# Altium PCB PCB1.PcbDoc (part 1 of 2)
Units mm, origin at the board's own origin, x right, y up, seen from the top; angles counter-clockwise.
Board outline 62 x 97.84 mm, 6 copper layers (Top Layer, +5V, Signal Layer 1, Signal Layer 2, +3.3V, Bottom Layer), stack 1.231 mm thick; 91 components, 73 nets, 358 pads, 48 vias.
Unrouted connection lines stored in the file: 110.
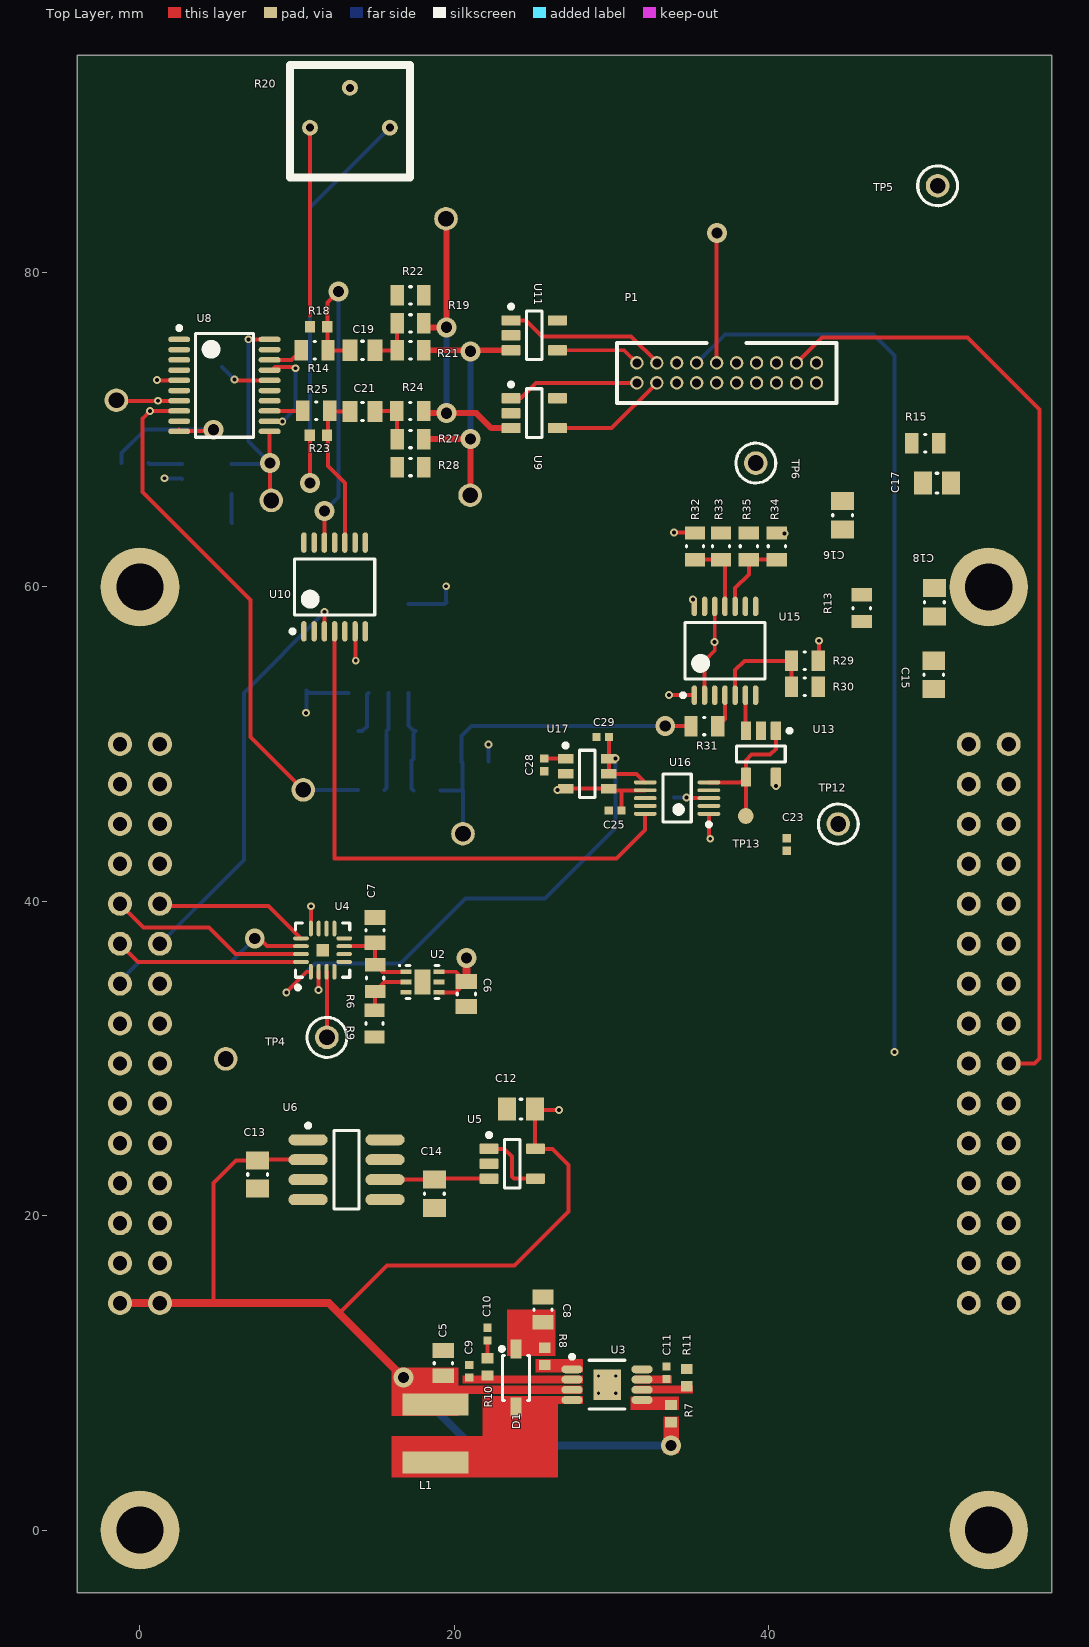
[diagram p0: Top Layer view]
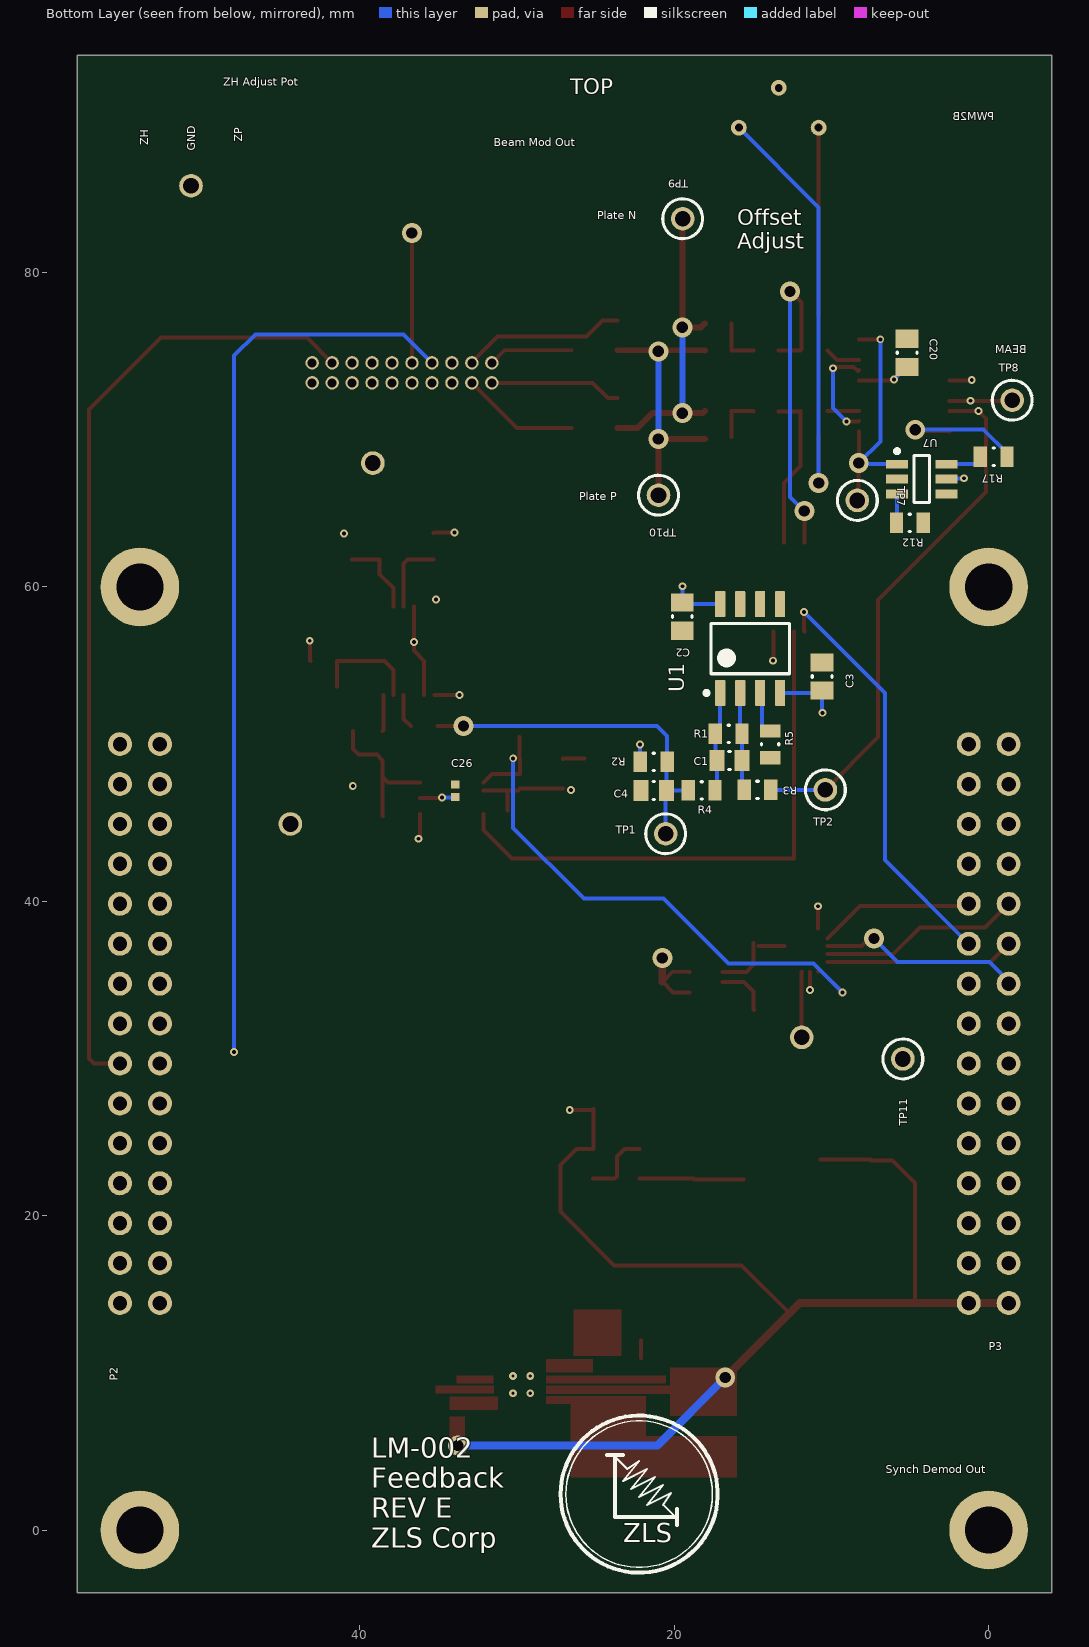
[diagram p1: Bottom Layer view, seen from below]
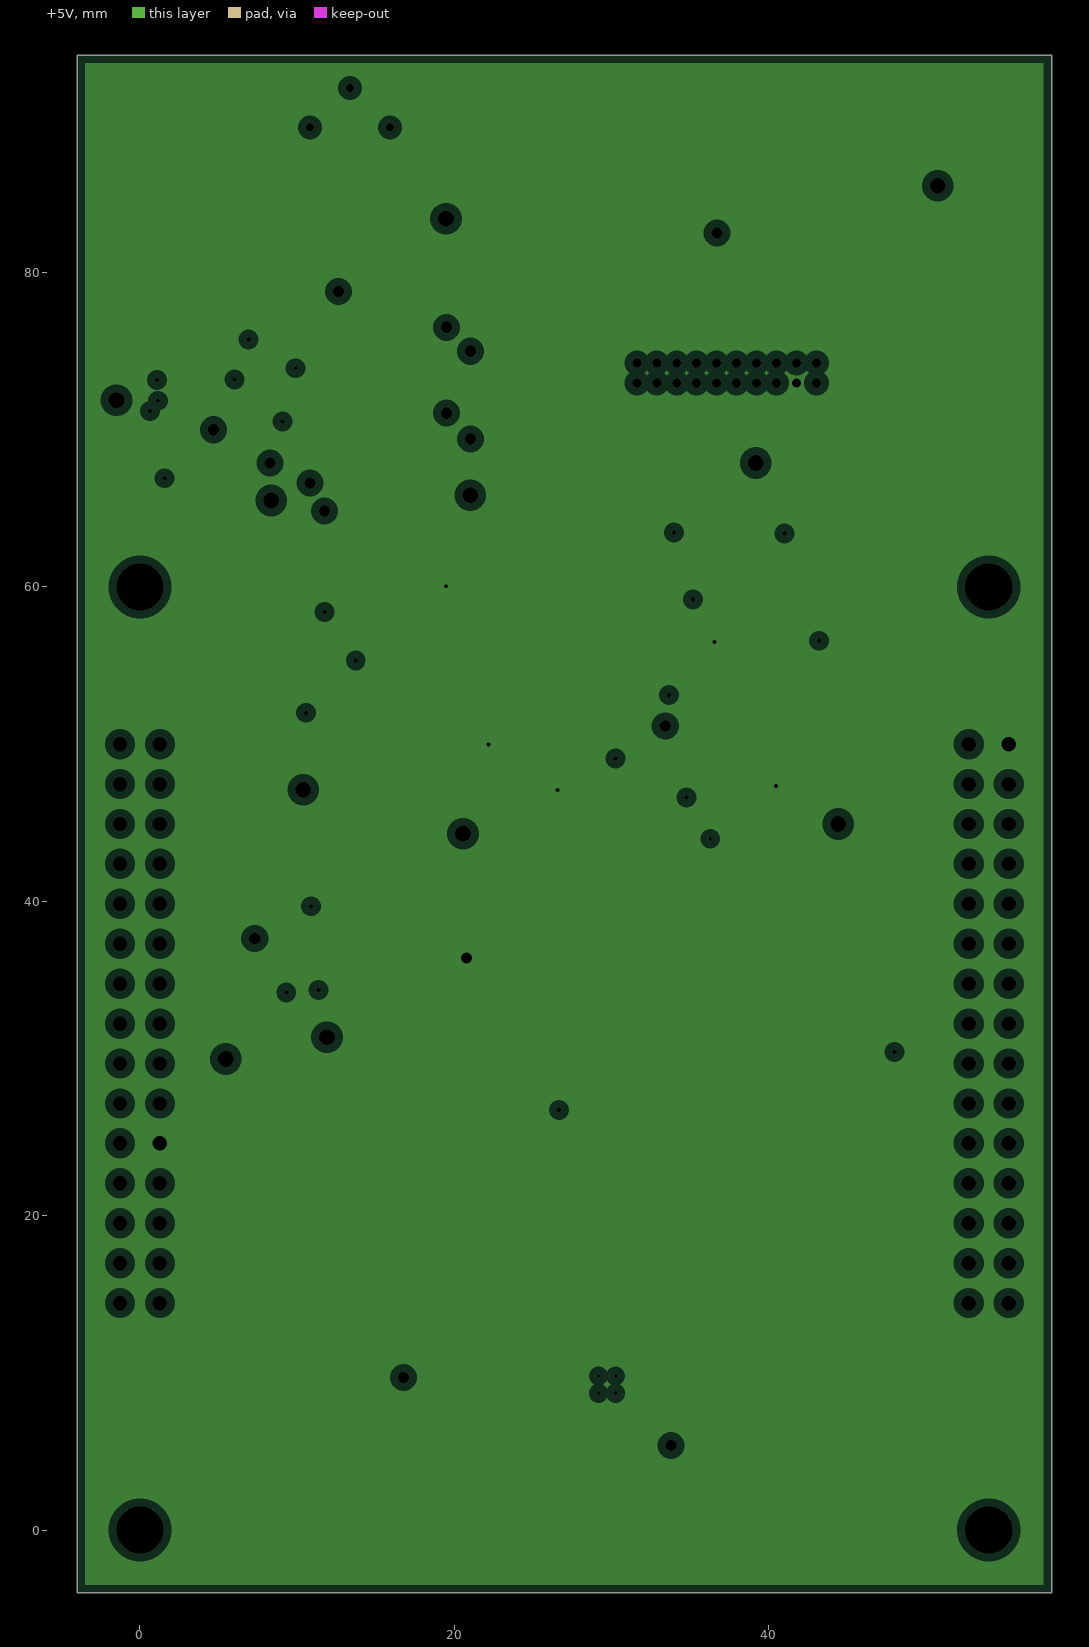
[diagram p2: +5V, clearances drawn from the general rule]
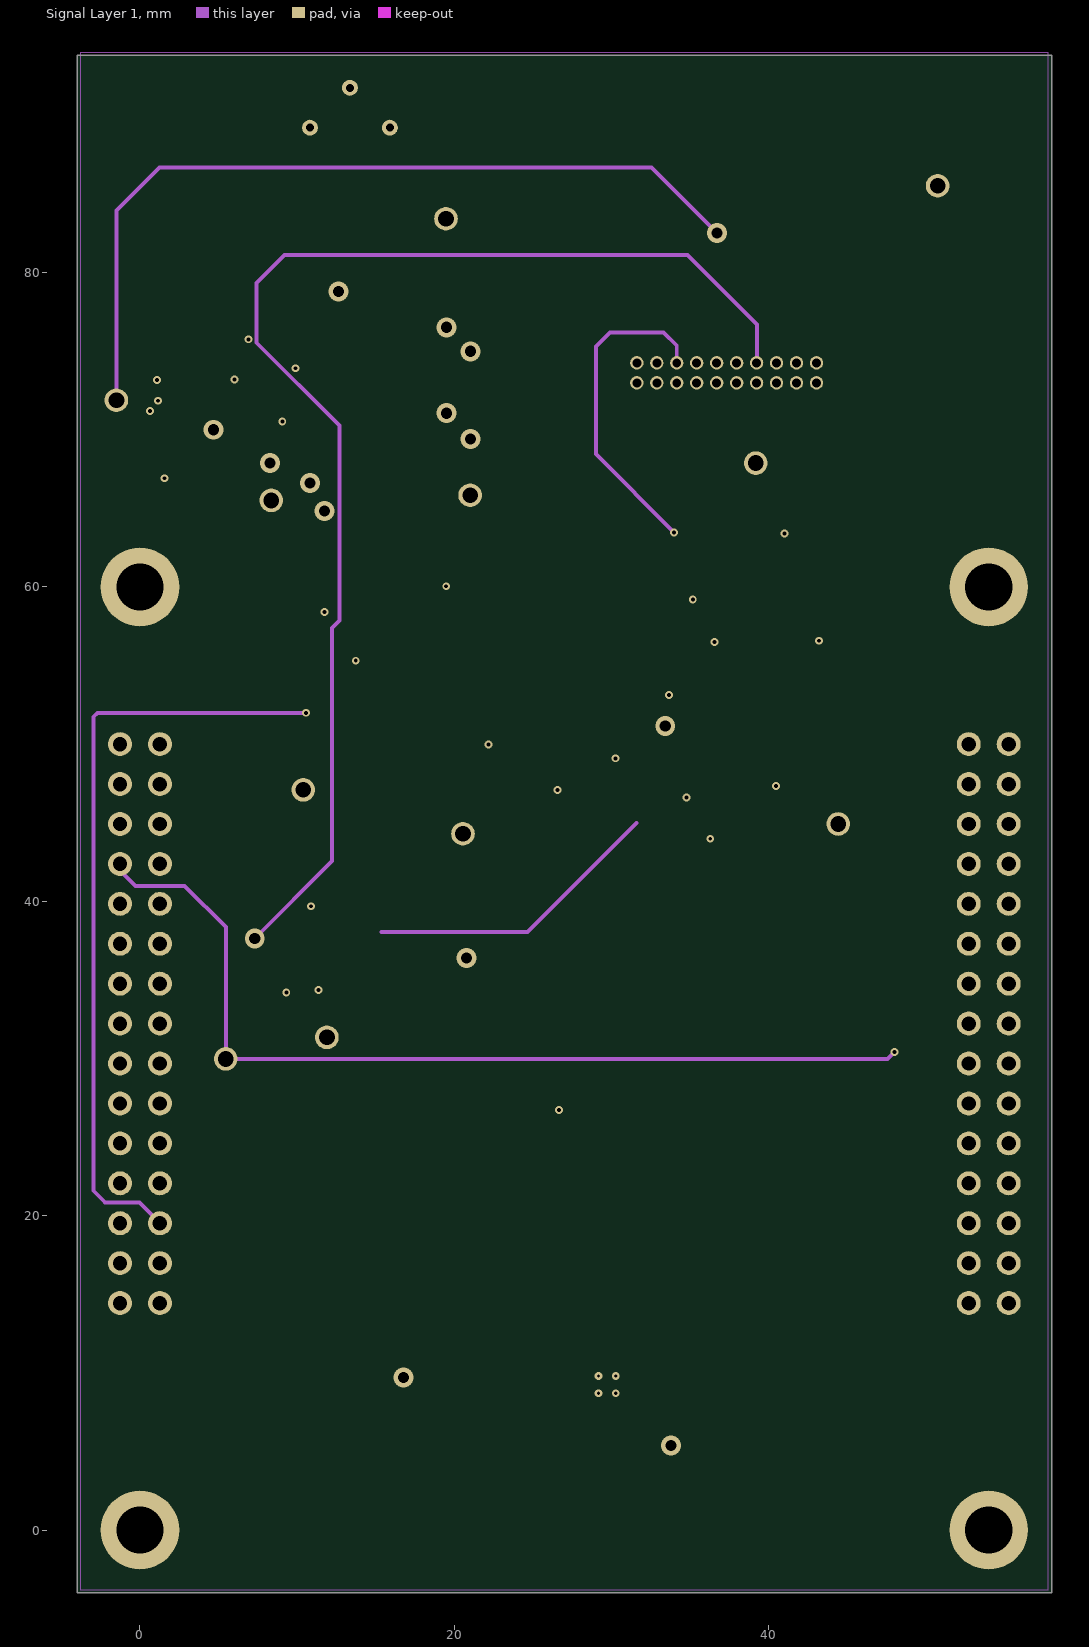
[diagram p3: Signal Layer 1]
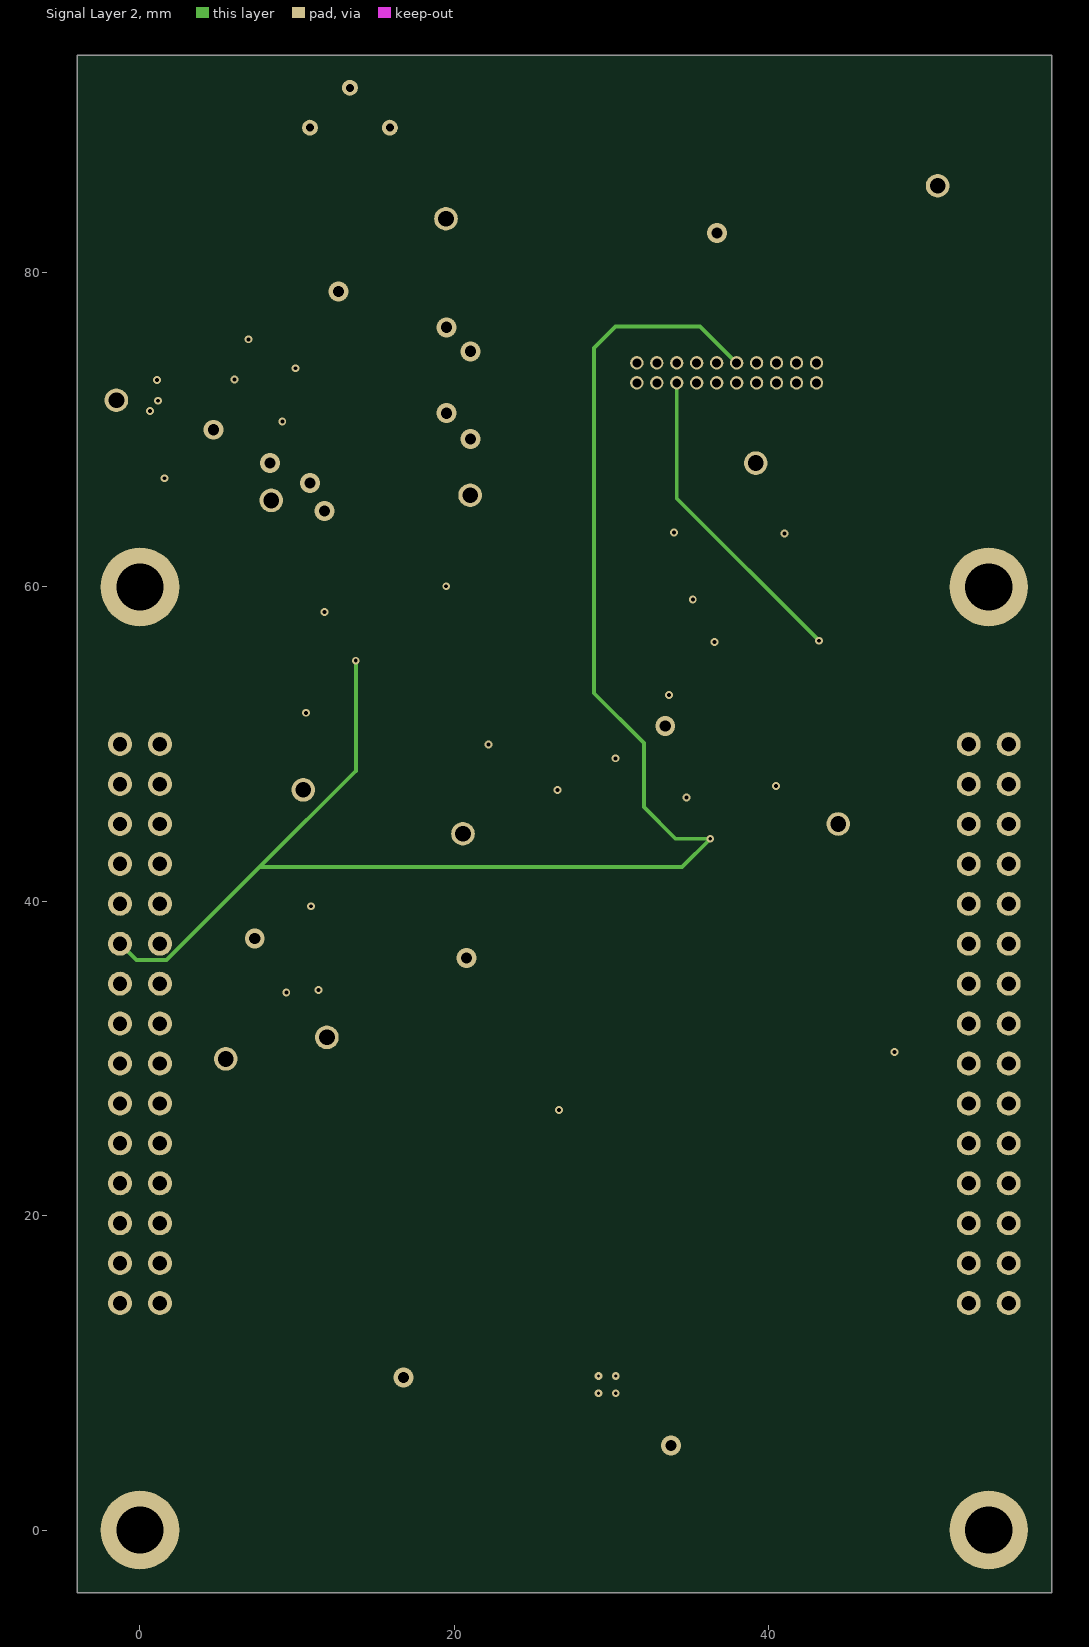
[diagram p4: Signal Layer 2]
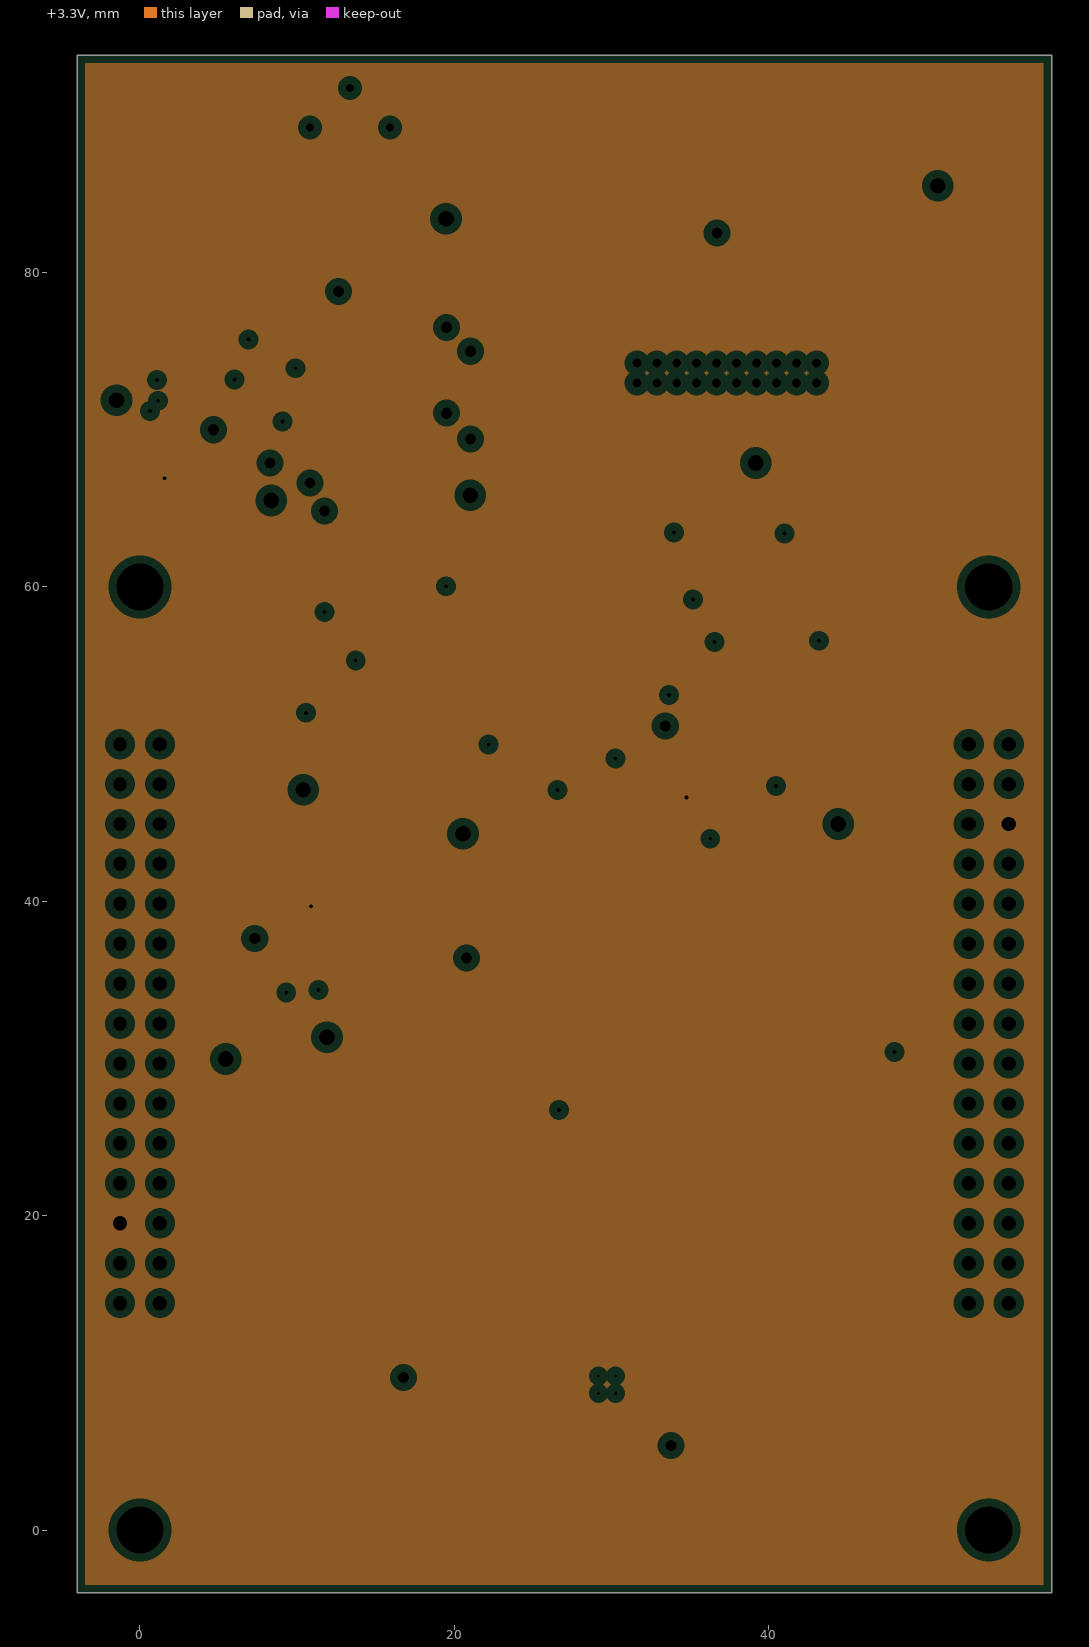
[diagram p5: +3.3V, clearances drawn from the general rule]

## Layer stack, top to bottom
Top Solder: solder mask 0.0102, Solder Resist, Dk 3.5
Top Layer: signal copper 0.0356
Dielectric 1: core 0.254, FR-4, Dk 4.2
+5V: plane copper 0.036, net +5
Dielectric 4: prepreg 0.127, Dk 4.2
Signal Layer 1: signal copper 0.036
Dielectric 5: core 0.254, Dk 4.2
Signal Layer 2: signal copper 0.036
Dielectric 6: prepreg 0.127, Dk 4.2
+3.3V: plane copper 0.036, net +3.3
Dielectric 3: core 0.254, Dk 4.2
Bottom Layer: signal copper 0.0356
Bottom Solder: solder mask 0.0102, Solder Resist, Dk 3.5

## Board outline
-4.003,-4.003 58,-4.003 58,93.841 -4.003,93.841

## Design rules (kind name [scope] priority, off if disabled: settings)
Clearance [All] p1: gap=0.15 ignorepadtopadclearanceinfootprint=TRUE except(0.04: SMDPad-SMDPad; 0.1: SMDPad-THPad)
DiffPairsRouting DiffPair_DiffPairsRouting [InDifferentialPair ('PLATE')] p1: maxlimit=0.254 minlimit=0.254 mostfreqgap=0.254 toplayer_minwidth=0.381 toplayer_maxwidth=0.381 toplayer_prefwidth=0.381 midlayer1_minwidth=0.381 midlayer1_maxwidth=0.381 midlayer1_prefwidth=0.381 midlayer2_minwidth=0.381 midlayer2_maxwidth=0.381 midlayer2_prefwidth=0.381 bottomlayer_minwidth=0.381 bottomlayer_maxwidth=0.381 bottomlayer_prefwidth=0.381 maxuncoupledlength=12.7
DiffPairsRouting [All] p2: maxlimit=0.254 minlimit=0.254 mostfreqgap=0.254 toplayer_minwidth=0.381 toplayer_maxwidth=0.381 toplayer_prefwidth=0.381 midlayer1_minwidth=0.381 midlayer1_maxwidth=0.381 midlayer1_prefwidth=0.381 midlayer2_minwidth=0.381 midlayer2_maxwidth=0.381 midlayer2_prefwidth=0.381 bottomlayer_minwidth=0.381 bottomlayer_maxwidth=0.381 bottomlayer_prefwidth=0.381 maxuncoupledlength=12.7
HoleSize [All] p1: absolutevalues=TRUE maxlimit=10 minlimit=0.076 maxpercent=80.000 minpercent=20.000
HoleToHoleClearance [All] p1: gap=0.12 allowstackedmicrovias=TRUE
MatchedLengths DiffPair_MatchedLengths [InDifferentialPair ('PLATE')] p1: tolerance=2.54 checknetsindiffpair=FALSE checkdiffpairvsdiffpair=TRUE checkxsignals=TRUE checkothers=TRUE
MinimumSolderMaskSliver [All] p1: minsoldermaskwidth=0.025
PlaneClearance [All] p1: clearance=0.508
PlaneConnect [All] p1: planeconnectstyle=Relief reliefexpansion=0.508 reliefentries=4 reliefconductorwidth=0.254 reliefairgap=0.254
PolygonConnect [All] p1: connectstyle=Relief reliefconductorwidth=0.254 reliefentries=4 polygonreliefangle="90 Angle" airgapwidth=0.254
RoomDefinition Synch_Demod [InComponentClass('Synch_Demod')] p1: confinementstyle=ConfineIn formatcopy=TRUE lockcomponents=FALSE outline 8.319,42.265 8.319,61.197 24.868,61.197 24.868,42.265
RoomDefinition ZP [InComponentClass('ZP')] p2: confinementstyle=ConfineIn formatcopy=TRUE lockcomponents=FALSE outline 36.317,2.079 36.317,16.049 15.058,16.049 15.058,2.079
RoomDefinition ADC [InComponentClass('ADC')] p3: confinementstyle=ConfineIn formatcopy=TRUE lockcomponents=FALSE outline 23.717,40.356 53.474,40.356 53.474,67.407 23.717,67.407
RoutingVias [All] p1: holewidth=0.711 width=1.27 viastyle="Through Hole" minholewidth=0.127 minwidth=0.9 maxholewidth=1.4 maxwidth=2.54
SilkToSilkClearance [All] p1: silktosilkclearance=0.12
SilkToSolderMaskClearance [IsPad] p1: minsilkscreentomaskgap=0.12 clearancetoexposedcopper=TRUE
SolderMaskExpansion [All] p1: expansion=0.102
Width [All] p1: maxlimit=0.5 minlimit=0.1 preferedwidth=0.254 minimp=50.000000 maximp=50.000000 favimp=50.000000
22 further rules are at their usual default settings.

## Classes and differential pairs
component class ZP: C5 C8 C9 C10 C11 D1 L1 R7 R8 R10 R11 U3
component class Synch_Demod: C1 C2 C3 C4 R1 R2 R3 R4 R5 TP1 TP2 U1
component class Voltage_Sources: C6 C7 C12 C13 C14 R6 R9 TP4 TP5 U2 U4 U5 U6
component class Sense&Connectors: 19.685mil C15 C16 C17 C18 C19 C20 C21 P1 P2 P3 R12 R13 R14 R15 R17 R18 R19 R20 R21 R22 R23 R24 R25 R27 R28 TP6 TP7 TP8 TP9 TP10 TP11 U7 U8 U9 U10 U11
component class ADC: C23 C25 C26 C28 C29 R29 R30 R31 R32 R33 R34 R35 TP12 TP13 U13 U15 U16 U17
differential pair PLATE: +PLATE_P -PLATE_N

## Components (designator, comment, footprint, x,y, rotation, side; value= is the part's Value field where it differs from the comment)
C1 "470nF" CAPC0805(2012)75_L 16.486,48.957 r0 bottom
C2 "CAP CER 0.1UF 25V X7R 0805" CAPC0805(2012)145_N 19.495,58.114 r270 bottom
C3 "CAP CER 0.1UF 25V X7R 0805" CAPC0805(2012)145_N 10.605,54.304 r90 bottom
C4 "22uF" CAPC0805(2012)75_L 21.312,47.053 r180 bottom
C5 "4.7uF" CAPC0805(2012)155_L 19.299,10.614 r270 top
C6 "CAP CER 1UF 25V X7R 0805" CAPC0805(2012)155_L 20.765,34.1 r90 top
C7 "CAP CER 1UF 25V X7R 0805" CAPC0805(2012)155_L 14.961,38.164 r270 top
C8 "CAP CER 1UF 25V X7R 0805" CAPC0805(2012)155_L 25.649,14.017 r270 top
C9 "220pF" CAPC0402(1005)60_L 20.95,10.106 r270 top
C10 "47pF" CAPC0402(1005)60_L 22.119,12.468 r270 top
C11 ".47uF" CAPC0402(1005)60_L 33.498,10.004 r270 top
C12 "CAP CER 0.1UF 25V X7R 0805" CAPC0805(2012)145_N 24.245,26.785 r0 top
C13 "Multilayer Ceramic Capacitors MLCC - SMD/SMT 0.01uF 50volts 10% X7R" CAPC0805(2012)145_N 7.481,22.619 r270 top
C14 "CAP CER 0.1UF 25V X7R 0805" CAPC0805(2012)145_N 18.733,21.4 r270 top
C15 "CAP CER 0.1UF 25V X7R 0805" CAPC0805(2012)145_N 50.495,54.407 r90 top
C16 "CAP CER 0.1UF 25V X7R 0805" CAPC0805(2012)145_N 44.704,64.567 r270 top
C17 "CAP CER 0.1UF 25V X7R 0805" CAPC0805(2012)145_N 50.712,66.612 r180 top
C18 "CAP CER 0.1UF 25V X7R 0805" CAPC0805(2012)145_N 50.546,59.03 r270 top
C19 "CAP CER 1UF 25V X7R 0805" CAPC0805(2012)155_L 14.161,75.058 r180 top
C20 "CAP CER 0.1UF 25V X7R 0805" CAPC0805(2012)145_N 5.195,74.892 r270 bottom
C21 "CAP CER 1UF 25V X7R 0805" CAPC0805(2012)155_L 14.161,71.17 r180 top
C23 "0.1uF" CAPC0402(1005)60_L 41.148,43.612 r90 top
C25 "0.1uF" CAPC0402(1005)60_L 30.226,45.771 r0 top
C26 "0.1uF" CAPC0402(1005)60_L 33.934,47.041 r270 bottom
C28 "0.1uF" CAPC0402(1005)60_L 25.718,48.68 r90 top
C29 "0.1uF" CAPC0402(1005)60_L 29.439,50.444 r180 top
D1 "1N5819HW-7-F" DIOD-SOD-123-2_V 23.922,9.674 r90 top
L1 "74404054330" "WE-LQS 5040" 18.791,6.143 r270 top
P1 "FTSH-110-02-F-D-ES" FTSH-110-02-F-D-ES 37.326,73.622 r180 top locked
P2 "TSW-115-14-G-D" TSW-115-14-G-D 55.27,14.44 r270 bottom locked
P3 "TSW-115-14-G-D" TSW-115-14-G-D 1.27,14.44 r270 bottom locked
R1 "300K" RESC0805(2012)_L 16.544,50.647 r180 bottom
R2 "499K" RESC0805(2012)_L 21.312,48.869 r0 bottom
R3 "18.2K" RESC0805(2012)_L 14.708,47.091 r180 bottom
R4 "249K" RESC0805(2012)_L 18.264,47.053 r180 bottom
R5 "33K" RESC0805(2012)_L 13.907,49.986 r90 bottom
R6 "?" RESC0805(2012)_L 14.961,35.116 r270 top
R7 "487k" RESC0402(1005)_M 33.777,7.413 r90 top
R8 "768" RESC0402(1005)_M 25.751,11.046 r90 top
R9 "?" RESC0805(2012)_L 14.923,32.22 r270 top
R10 "6.19k" RESC0402(1005)_M 22.119,10.385 r90 top
R11 "6.19k" RESC0402(1005)_M 34.793,9.699 r90 top
R12 "43.2K" RESC0805(2012)_L 5.017,64.072 r180 bottom
R13 "0" RESC0805(2012)_L 45.923,58.649 r270 top
R14 "4.02K" RESC0805(2012)_L 11.113,75.058 r180 top
R15 "DNP" RESC0805(2012)_L 49.962,69.139 r0 top
R17 "0" RESC0805(2012)_L -0.317,68.288 r0 bottom
R18 "DNP" RESC0402(1005)_M 11.367,76.556 r0 top
R19 "0" RESC0805(2012)_L 17.209,76.772 r180 top
R20 "DNP" "Trimmer 2.54" 10.817,89.218 r0 top
R21 "DNP" RESC0805(2012)_L 17.209,75.058 r180 top
R22 "1M" RESC0805(2012)_L 17.209,78.55 r180 top
R23 "DNP" RESC0402(1005)_M 11.354,69.647 r180 top
R24 "DNP" RESC0805(2012)_L 17.198,71.196 r180 top
R25 "4.02K" RESC0805(2012)_L 11.215,71.209 r0 top
R27 "0" RESC0805(2012)_L 17.209,69.406 r180 top
R28 "1M" RESC0805(2012)_L 17.209,67.628 r180 top
R29 "100K" RESC0805(2012)_L 42.298,55.303 r0 top
R30 "10K" RESC0805(2012)_L 42.298,53.652 r180 top
R31 "100" RESC0805(2012)_L 35.909,51.151 r180 top
R32 "100K" RESC0805(2012)_L 35.313,62.581 r90 top
R33 "10K" RESC0805(2012)_L 36.964,62.581 r270 top
R34 "10K" RESC0805(2012)_L 40.52,62.581 r90 top
R35 "10K" RESC0805(2012)_L 38.742,62.581 r270 top
TP1 "5003" KSTN-5003 20.55,44.297 r180 bottom
TP2 "5003" KSTN-5003 10.39,47.091 r180 bottom
TP4 "5003" KSTN-5003 11.894,31.344 r0 top
TP5 "5003" KSTN-5003 50.749,85.522 r0 top
TP6 "5003" KSTN-5003 39.18,67.882 r0 top
TP7 "5003" KSTN-5003 8.357,65.507 r180 bottom
TP8 "5003" KSTN-5003 -1.499,71.882 r0 bottom
TP9 "5003" KSTN-5003 19.47,83.427 r90 bottom
TP10 "5003" KSTN-5003 21.006,65.837 r270 bottom
TP11 "5003" KSTN-5003 5.461,29.972 r90 bottom
TP12 "5003" KSTN-5003 44.425,44.92 r90 top
TP13 "TP-SM-C-100" TP-SM-C-100 38.545,45.428 r90 top
U1 "LPC662AIM" D0008A_M 15.177,56.082 r90 bottom
U2 "TPS79901DRVRG4" TI-DRV6-1600X1000TP_V 17.971,34.862 r0 top
U3 "LT8570" LT8570-MSOP 29.716,9.249 r0 top
U4 "DAC80504" DAC80504 11.621,36.894 r90 top
U5 "OPA188AIDBVR" DBV0005A_M 23.686,23.305 r0 top
U6 "ADR4550BRZ-R7" ADI-R-8_M 13.145,22.924 r0 top
U7 "LTC6994MPS6-2#TRMPBF" LTC6994MPS6-2#TRMPBF 4.255,66.866 r180 bottom
U8 "MAX333AEUP+" TSOP65P640X90-20N 5.373,72.821 r0 top
U9 "OPA188AIDBVR" DBV0005A_M 25.083,71.057 r0 top
U10 "MAX5481EUD-T" MAXM-U14-1_L 12.383,60 r90 top
U11 "OPA188AIDBVR" DBV0005A_M 25.083,76.01 r0 top
U13 "OPA188AIDBVR" DBV0005A_M 39.504,49.373 r270 top
U15 "ADG1204YRUZ-REEL7" ADI-RU-14_L 37.218,55.938 r90 top
U16 "MAX11100EUB+T" U10+2_L 34.17,46.565 r180 top
U17 "MAX6070AAUT41+T" SOT95P280X445-6N 28.455,48.114 r0 top

## Footprints (in the part's own frame and the unit in brackets; to place one, negate y for a bottom-side part, rotate by r counter-clockwise, add the part's x,y. Pads: shape width x height; smd on the part's side, far side on the other; paste and mask are expansions set on the pad)
ADI-R-8_M [mm] "SOIC, 8-Leads, Body 4.9x3.9mm, Pitch 1.27mm, IPC Low Density"
  oval 2.5x0.7 smd: 1(-2.45,1.905) 2(-2.45,0.635) 3(-2.45,-0.635) 4(-2.45,-1.905) 5(2.45,-1.905) 6(2.45,-0.635) 7(2.45,0.635) 8(2.45,1.905)
  silkscreen extent -2.57,-2.5 0.8,2.93, body extent -2,-2.5 2,2.5, height 1.75
ADI-RU-14_L [mm] "SOP, 14-Leads, Body 5x4.4mm, Pitch 0.65mm, IPC High Density"
  oval 1.25x0.35 smd: 1(-2.825,1.95) 2(-2.825,1.3) 3(-2.825,0.65) 4(-2.825,0) 5(-2.825,-0.65) 6(-2.825,-1.3) 7(-2.825,-1.95) 8(2.825,-1.95) 9(2.825,-1.3) 10(2.825,-0.65) 11(2.825,0) 12(2.825,0.65) 13(2.825,1.3) 14(2.825,1.95)
  silkscreen extent -2.95,-2.55 1.8,2.8, body extent -2.25,-2.55 2.25,2.55, height 1.2
CAPC0402(1005)60_L [mm] "Chip Capacitor, Body 1.0x0.5mm, Height 0.6mm, IPC High Density"
  rect 0.52x0.52 smd: 1(-0.4,0) 2(0.4,0)
  body extent -0.55,-0.3 0.55,0.3, height 0.6
CAPC0805(2012)75_L [mm] "Chip Capacitor, Body 2.0x1.2mm, Height 0.75mm, IPC High Density"
  rect 0.95x1.35 smd: 1(-0.8,0) 2(0.8,0)
  silkscreen extent -0.05,-0.58 0.05,0.58, body extent -1.1,-0.72 1.1,0.72, height 0.75
CAPC0805(2012)145_N [mm] "Chip Capacitor, Body 2.0x1.2mm, Height 1.45mm, IPC Medium Density"
  rect 1.15x1.45 smd: 1(-0.9,0) 2(0.9,0)
  silkscreen extent -0.05,-0.62 0.05,0.63, body extent -1.1,-0.72 1.1,0.73, height 1.45
CAPC0805(2012)155_L [mm] "Chip Capacitor, Body 2.0x1.2mm, Height 1.55mm, IPC High Density"
  rect 0.95x1.35 smd: 1(-0.8,0) 2(0.8,0)
  silkscreen extent -0.05,-0.58 0.05,0.58, body extent -1.1,-0.72 1.1,0.72, height 1.55
D0008A_M [mm] "SOIC, 8-Leads, Body 5x4mm, Pitch 1.27mm, IPC Low Density"
  rrect15% 1.65x0.65 smd: 1(-2.825,1.905) 2(-2.825,0.635) 3(-2.825,-0.635) 4(-2.825,-1.905) 5(2.825,-1.905) 6(2.825,-0.635) 7(2.825,0.635) 8(2.825,1.905)
  silkscreen extent -2.95,-2.5 1.6,2.91, body extent -3,-2.45 3,2.45, height 1.63
DAC80504 [mm]
  oval 1x0.25 smd: 1(-1.375,0.75) 2(-1.375,0.25) 3(-1.375,-0.25) 4(-1.375,-0.75) 9(1.375,-0.75) 10(1.375,-0.25) 11(1.375,0.25) 12(1.375,0.75)
  oval 0.25x1 smd: 5(-0.75,-1.375) 6(-0.25,-1.375) 7(0.25,-1.375) 8(0.75,-1.375) 13(0.75,1.375) 14(0.25,1.375) 15(-0.25,1.375) 16(-0.75,1.375)
  rect 0.8x0.8 smd: 17(0,0)
  silkscreen extent -2.5,-1.72 1.72,1.73, body extent -1.66,-1.66 1.66,1.66, height 0.8
DBV0005A_M [mm] "SOT23, 5-Leads, Body 3.05x1.75mm, Pitch 0.95mm, IPC Low Density"
  rrect15% 1.2x0.65 smd: 1(-1.475,0.95) 2(-1.475,0) 3(-1.475,-0.95) 4(1.475,-0.95) 5(1.475,0.95)
  silkscreen extent -1.6,-1.55 0.5,1.95, body extent -1.42,-1.46 1.42,1.46, height 1.08
DIOD-SOD-123-2_V [mm] "SOD-123, 2-Leads, Body 2.85x1.7mm (max), Pitch 3.7mm"
  rect 1.2x0.7 smd: 1(-1.85,0) 2(1.85,0)
  silkscreen extent -1.43,-0.85 1.97,1.02, body extent -1.42,-0.85 1.43,0.85, height 1.45
FTSH-110-02-F-D-ES [mm] "CONN HEADER VERT 20POS 1.27MM"
  round 0.85 hole 0.57: 1(-5.715,-0.635) 2(-5.715,0.635) 3(-4.445,-0.635) 4(-4.445,0.635) 5(-3.175,-0.635) 6(-3.175,0.635) 7(-1.905,-0.635) 8(-1.905,0.635) 9(-0.635,-0.635) 10(-0.635,0.635) 11(0.635,-0.635) 12(0.635,0.635) 13(1.905,-0.635) 14(1.905,0.635) 15(3.175,-0.635) 16(3.175,0.635) 17(4.445,-0.635) 18(4.445,0.635) 19(5.715,-0.635) 20(5.715,0.635)
  silkscreen extent -6.98,-1.91 6.98,1.91, body extent -7.33,-2.44 7.49,2.34, height 4.52
KSTN-5003 [mm] "Test Point, Through Hole, Dia 2.54mm"
  round 1.5 hole 1: 1(0,0)
  silkscreen extent -1.27,-1.27 1.27,1.27, body extent -1.27,-1.27 1.27,1.27, height 4.57
LT8570-MSOP [mm]
  oval 1.35x0.5 smd: 1(-2.225,0.975) 2(-2.225,0.325) 3(-2.225,-0.325) 4(-2.225,-0.975) 5(2.225,-0.975) 6(2.225,-0.325) 7(2.225,0.325) 8(2.225,0.975)
  rect 1.75x1.96 smd: 9(0,0)
  silkscreen extent -2.35,-1.55 1.15,1.9, body extent -2.45,-1.55 2.45,1.55, height 1.1
LTC6994MPS6-2#TRMPBF [mm] "SOT23, 6-Leads, Body 2.90x3.23mm, Pitch 0.95mm, IPC Medium Density"
  rect 1.4x0.55 smd: 1(-1.575,0.95) 2(-1.575,0) 3(-1.575,-0.95) 4(1.575,-0.95) 5(1.575,0) 6(1.575,0.95)
  silkscreen extent -1.7,-1.5 0.5,1.9, body extent -1.92,-1.5 1.93,1.5, height 1
MAXM-U14-1_L [mm] "SOP, 14-Leads, Body 5x4.4mm, Pitch 0.65mm, IPC High Density"
  oval 1.3x0.35 smd: 1(-2.825,1.95) 2(-2.825,1.3) 3(-2.825,0.65) 4(-2.825,0) 5(-2.825,-0.65) 6(-2.825,-1.3) 7(-2.825,-1.95) 8(2.825,-1.95) 9(2.825,-1.3) 10(2.825,-0.65) 11(2.825,0) 12(2.825,0.65) 13(2.825,1.3) 14(2.825,1.95)
  silkscreen extent -2.95,-2.55 1.78,2.8, body extent -2.25,-2.55 2.25,2.55, height 1.1
RESC0402(1005)_M [mm] "Chip Resistor, Body 1.0x0.5mm, IPC Low Density"
  rect 0.65x0.75 smd: 1(-0.55,0) 2(0.55,0)
  body extent -0.52,-0.28 0.53,0.28, height 0.4
RESC0805(2012)_L [mm] "Chip Resistor, Body 2.0x1.3mm, IPC High Density"
  rect 0.85x1.3 smd: 1(-0.85,0) 2(0.85,0)
  silkscreen extent -0.05,-0.55 0.05,0.55, body extent -1.1,-0.67 1.1,0.68, height 0.7
SOT95P280X445-6N [mm] "SOT23, 6-Leads, Body 2.90x2.80mm, Pitch 0.95mm, IPC Medium Density"
  rect 1x0.6 smd: 1(-1.375,0.95) 2(-1.375,0) 3(-1.375,-0.95) 4(1.375,-0.95) 5(1.375,0) 6(1.375,0.95)
  silkscreen extent -1.5,-1.5 0.5,1.92, body extent -2.11,-1.78 2.11,1.73, height 1.08
TI-DRV6-1600X1000TP_V [mm] "SON, 6-Leads, Body 2x2mm, Pitch 0.65mm, Thermal Pad 1X1.6mm"
  rect 0.7x0.3 smd: 1(-1.05,0.65) 2(-1.05,0) 3(-1.05,-0.65) 4(1.05,-0.65) 5(1.05,0) 6(1.05,0.65)
  rect 1x1.6 smd: 7(0,0)
  silkscreen extent -1.5,-1.05 1.05,1.1, body extent -1,-1 1,1, height 0.8
TP-SM-C-100 [mm] "Test Point, Surface Mounting, Circular, Pad Diameter 1mm"
  round 1 smd: 1(0,0)
"Trimmer 2.54" [mil]
  round 40 hole 20: 1(0,0) 2(100,100) 3(200,0)
  silkscreen extent -50,-125 250,158, body extent -60,-126 260,200, height 175
TSOP65P640X90-20N [mm] "TSOP, 20-Leads, Body 6.50x4.40mm, Pitch 0.65mm, IPC Medium Density"
  oval 1.4x0.35 smd: 1(-2.875,2.925) 2(-2.875,2.275) 3(-2.875,1.625) 4(-2.875,0.975) 5(-2.875,0.325) 6(-2.875,-0.325) 7(-2.875,-0.975) 8(-2.875,-1.625) 9(-2.875,-2.275) 10(-2.875,-2.925) 11(2.875,-2.925) 12(2.875,-2.275) 13(2.875,-1.625) 14(2.875,-0.975) 15(2.875,-0.325) 16(2.875,0.325) 17(2.875,0.975) 18(2.875,1.625) 19(2.875,2.275) 20(2.875,2.925)
  silkscreen extent -3,-3.3 1.85,3.77, body extent -2.25,-3.3 2.25,3.3, height 0.9
TSW-115-14-G-D [mil]
  round 60 hole 36.02: 1(-1400,100) 2(-1400,0) 3(-1300,100) 4(-1300,0) 5(-1200,100) 6(-1200,0) 7(-1100,100) 8(-1100,0) 9(-1000,100) 10(-1000,0) 11(-900,100) 12(-900,0) 13(-800,100) 14(-800,0) 15(-700,100) 16(-700,0) 17(-600,100) 18(-600,0) 19(-500,100) 20(-500,0) 21(-400,100) 22(-400,0) 23(-300,100) 24(-300,0) 25(-200,100) 26(-200,0) 27(-100,100) 28(-100,0) 29(0,100) 30(0,0)
  body extent -1450,-50 50,150, height 118
U10+2_L [mm] "TSSOP, 10-Leads, Body 3x3mm, Pitch 0.5mm, IPC High Density"
  oval 1.45x0.25 smd: 1(-2.025,1) 2(-2.025,0.5) 3(-2.025,0) 4(-2.025,-0.5) 5(-2.025,-1) 6(2.025,-1) 7(2.025,-0.5) 8(2.025,0) 9(2.025,0.5) 10(2.025,1)
  silkscreen extent -2.15,-1.52 0.9,1.8, body extent -1.55,-1.55 1.55,1.55, height 1.1
"WE-LQS 5040" [mm] "SMD Power Inductor, 2-Leads, Body 5.0x5.0mm"
  rect 1.4x4.2 smd: 1(-1.85,0) 2(1.85,0)
  body extent -2.5,-2.5 2.5,2.5, height 3.99

## Part data
C1: library part CMP-1036-02117-1, "CAP CER 0.47UF 25V X7R 0805", Manufacturer="Murata Electronics North America", Manufacturer Part Number=GRM219R71E474KA88D, Operating Temperature="-55°C ~ 125°C", Package / Case="0805 (2012 Metric)", Ratings=-, Supplier Part Number 1=490-11584-1-ND, Temperature Coefficient=X7R, Tolerance=±10%, Voltage - Rated=25V, Applications="General Purpose", Category=Capacitors, ComponentLink1Description=https://www.murata.com/~/media/webrenewal/support/library/catalog/products/capacitor/mlcc/c02e.ashx?la=en-us, ComponentLink1URL=https://www.murata.com/~/media/webrenewal/support/library/catalog/products/capacitor/mlcc/c02e.ashx?la=en-us, Features=-, Height - Seated (Max)=-, Lead Spacing=-, Lead Style=-, Mounting Type="Surface Mount, MLCC", Packaging="Cut Tape (CT)", Part Status=Active, Pricing 1="1=0.38, 10=0.262, 100=0.1573, 500=0.118, 1000=0.09964 (USD)", RoHS="RoHS Compliant", Size / Dimension="0.079\" L x 0.049\" W (2.00mm x 1.25mm)", Stock 1=410, Supplier 1=Digi-Key, Thickness (Max)="0.037\" (0.95mm)"
C2 C3 C12 C14 C15 C16 C17 C18 C20: library part CMP-1036-04795-1, Capacitance=0.1µF, Manufacturer="Murata Electronics North America", Manufacturer Part Number=GRM21BR71E104KA01L, Operating Temperature="-55°C ~ 125°C", Package / Case="0805 (2012 Metric)", Ratings=-, Supplier Part Number 1=490-1673-6-ND, Temperature Coefficient=X7R, Tolerance=±10%, Voltage - Rated=25V, Applications="General Purpose", Category=Capacitors, ComponentLink1Description=http://www.murata.com/~/media/webrenewal/support/library/catalog/products/capacitor/mlcc/c02e.ashx, ComponentLink1URL=http://www.murata.com/~/media/webrenewal/support/library/catalog/products/capacitor/mlcc/c02e.ashx, Features=-, Height - Seated (Max)=-, Lead Spacing=-, Lead Style=-, Mounting Type="Surface Mount, MLCC", Packaging=Digi-Reel®, Part Status=Active, Pricing 1="1=0.2, 10=0.145, 100=0.0683, 500=0.04788, 1000=0.03964 (USD)", RoHS="RoHS Compliant", Size / Dimension="0.079\" L x 0.049\" W (2.00mm x 1.25mm)", Stock 1=891652, Supplier 1=Digi-Key, Thickness (Max)="0.053\" (1.35mm)"
C4: library part CMP-1036-02117-1, "CAP CER 22UF 25V X5R 0805", Manufacturer="Murata Electronics North America", Manufacturer Part Number=GRM21BR61E226ME44L, Operating Temperature="-55°C ~ 85°C", Package / Case="0805 (2012 Metric)", Ratings=-, Supplier Part Number 1=490-10749-1-ND, Temperature Coefficient=X5R, Tolerance=±20%, Voltage - Rated=25V, Applications="General Purpose", Category=Capacitors, ComponentLink1Description=http://search.murata.co.jp/Ceramy/image/img/A01X/G101/ENG/GRM21BR61E226ME44-01.pdf, ComponentLink1URL=http://search.murata.co.jp/Ceramy/image/img/A01X/G101/ENG/GRM21BR61E226ME44-01.pdf, Features=-, Height - Seated (Max)=-, Lead Spacing=-, Lead Style=-, Mounting Type="Surface Mount, MLCC", Notification="Current market demand for these product types have resulted in fluctuating and extending lead times. Lead times may differ.", Packaging="Cut Tape (CT)", Part Status=Active, Pricing 1="1=0.57, 10=0.404, 100=0.2663, 500=0.19722, 1000=0.16764 (USD)", RoHS="RoHS Compliant", Size / Dimension="0.079\" L x 0.049\" W (2.00mm x 1.25mm)", Stock 1=2004, Supplier 1=Digi-Key, Thickness (Max)="0.057\" (1.45mm)"
C5: library part CMP-1036-04882-1
C6 C7: library part CMP-1036-04882-1, Capacitance=2.2uF, Manufacturer="Murata Electronics North America", Manufacturer Part Number=GRM21BR71E105KA99L, Operating Temperature="-55°C ~ 125°C", Package / Case="0805 (2012 Metric)", Ratings=-, Supplier Part Number 1=490-6484-6-ND, Temperature Coefficient=X7R, Tolerance=±10%, Voltage - Rated=25V, Applications="General Purpose", Category=Capacitors, ComponentLink1Description=http://www.murata.com/~/media/webrenewal/support/library/catalog/products/capacitor/mlcc/c02e.ashx, ComponentLink1URL=http://www.murata.com/~/media/webrenewal/support/library/catalog/products/capacitor/mlcc/c02e.ashx, Features=-, Height - Seated (Max)=-, Lead Spacing=-, Lead Style=-, Mounting Type="Surface Mount, MLCC", Packaging=Digi-Reel®, Part Status=Active, Pricing 1="1=0.14, 10=0.099, 100=0.0468, 500=0.0328, 1000=0.02715 (USD)", RoHS="RoHS Compliant", Size / Dimension="0.079\" L x 0.049\" W (2.00mm x 1.25mm)", Stock 1=295074, Supplier 1=Digi-Key, Thickness (Max)="0.053\" (1.35mm)"
C8: library part CMP-1036-04882-1, Capacitance=4.7uF, Manufacturer="Murata Electronics North America", Manufacturer Part Number=GRM21BR71E105KA99L, Operating Temperature="-55°C ~ 125°C", Package / Case="0805 (2012 Metric)", Ratings=-, Supplier Part Number 1=490-6484-6-ND, Temperature Coefficient=X7R, Tolerance=±10%, Voltage - Rated=25V, Applications="General Purpose", Category=Capacitors, ComponentLink1Description=http://www.murata.com/~/media/webrenewal/support/library/catalog/products/capacitor/mlcc/c02e.ashx, ComponentLink1URL=http://www.murata.com/~/media/webrenewal/support/library/catalog/products/capacitor/mlcc/c02e.ashx, Features=-, Height - Seated (Max)=-, Lead Spacing=-, Lead Style=-, Mounting Type="Surface Mount, MLCC", Packaging=Digi-Reel®, Part Status=Active, Pricing 1="1=0.14, 10=0.099, 100=0.0468, 500=0.0328, 1000=0.02715 (USD)", RoHS="RoHS Compliant", Size / Dimension="0.079\" L x 0.049\" W (2.00mm x 1.25mm)", Stock 1=295074, Supplier 1=Digi-Key, Thickness (Max)="0.053\" (1.35mm)"
C9 C10 C11: library part CMP-1034-00252-1, "CAP CER 0.1UF 10V X7R 0402"
C13: library part CMP-1036-04795-1, Capacitance=10nF, Case/Package=0805, Case Code (Metric)=2012, Dielectric=X7R, Dielectric Material=Ceramic, Manufacturer=Kemet, Manufacturer Part Number=C0805C103K5RACAUTO, Max Operating Temperature=125°C, Min Operating Temperature=-55°C, Package Quantity=1, Supplier Part Number 1=399-6924-1-ND, Tolerance=10%, Voltage Rating=50V, Case Code (Imperial)=0805, ComponentLink1Description=https://datasheet.ciiva.com/22700/1693454-22700519.pdf, ComponentLink1URL=https://datasheet.ciiva.com/22700/1693454-22700519.pdf, ComponentLink2Description=https://datasheet.ciiva.com/7842/1693454-7842175.pdf, ComponentLink2URL=https://datasheet.ciiva.com/7842/1693454-7842175.pdf, Contact Plating=Tin, Depth=1.25mm, Height=0.78mm, Length=2mm, Mount="Surface Mount", Packaging="Tape and Reel", Pricing 1="1=0.12, 10=0.087, 100=0.041, 500=0.0287, 1000=0.0238 (USD)", Radiation Hardening=No, REACH SVHC="No SVHC", Stock 1=63236, Supplier 1=Digi-Key, Termination=SMD/SMT, Thickness=0.035inch, Voltage Rating (DC)=50V, Width=0.049inch
C19 C21: library part CMP-1036-04882-1, Capacitance=220pF, Manufacturer="Murata Electronics North America", Manufacturer Part Number=GRM21BR71E105KA99L, Operating Temperature="-55°C ~ 125°C", Package / Case="0805 (2012 Metric)", Ratings=-, Supplier Part Number 1=490-6484-6-ND, Temperature Coefficient=X7R, Tolerance=±10%, Voltage - Rated=25V, Applications="General Purpose", Category=Capacitors, ComponentLink1Description=http://www.murata.com/~/media/webrenewal/support/library/catalog/products/capacitor/mlcc/c02e.ashx, ComponentLink1URL=http://www.murata.com/~/media/webrenewal/support/library/catalog/products/capacitor/mlcc/c02e.ashx, Features=-, Height - Seated (Max)=-, Lead Spacing=-, Lead Style=-, Mounting Type="Surface Mount, MLCC", Packaging=Digi-Reel®, Part Status=Active, Pricing 1="1=0.14, 10=0.099, 100=0.0468, 500=0.0328, 1000=0.02715 (USD)", RoHS="RoHS Compliant", Size / Dimension="0.079\" L x 0.049\" W (2.00mm x 1.25mm)", Stock 1=295074, Supplier 1=Digi-Key, Thickness (Max)="0.053\" (1.35mm)"
C23 C25 C26 C28 C29: library part CMP-1034-00252-1, "CAP CER 0.1UF 10V X7R 0402", Manufacturer="Murata Electronics North America", Manufacturer Part Number=GRM155R71A104KA01D, Operating Temperature="-55°C ~ 125°C", Package / Case="0402 (1005 Metric)", Ratings=-, Supplier Part Number 1=490-6321-1-ND, Temperature Coefficient=X7R, Tolerance=±10%, Voltage - Rated=10V, Applications="General Purpose", Category=Capacitors, ComponentLink1Description=http://www.murata.com/~/media/webrenewal/support/library/catalog/products/capacitor/mlcc/c02e.ashx?la=en-us, ComponentLink1URL=http://www.murata.com/~/media/webrenewal/support/library/catalog/products/capacitor/mlcc/c02e.ashx?la=en-us, Features=-, Height - Seated (Max)=-, Lead Spacing=-, Mounting Type="Surface Mount, MLCC", Packaging="Cut Tape (CT)", Part Status=Active, Pricing 1="1=0.1, 10=0.014, 100=0.0063, 500=0.00446, 1000=0.00351, 2500=0.00319, 5000=0.00293 (USD)", RoHS="RoHS Compliant", Size / Dimension="0.039\" L x 0.020\" W (1.00mm x 0.50mm)", Stock 1=2920395, Supplier 1=Digi-Key, Thickness (Max)="0.022\" (0.55mm)"
D1: library part CMP-0303-00003-1, "1.0 A Surface Mount Schottky Barrier Rectifier, 40 V, -65 to 125 degC, 2-Pin SOD-123 Package, RoHS, Tape and Reel", @ Terminal Temperature TT (degC)=90, Forward Voltage Drop VF (V)=0.45, Manufacturer="Diodes Inc", Maximum Average Rectified Current IO (A)=1, Maximum Reverse Current IR (uA)=50, Operating and Storage Temperature Range="-65 to 125 degC", Peak Forward Surge Current IFSM (A)=25, Peak Repetitive Reverse Voltage VRRM (V)=40, @ IF (A)=1, @ VR (V)=40, ComponentLink1Description="Manufacturer URL", ComponentLink1URL=http://www.diodes.com/, ComponentLink2Description=Datasheet, ComponentLink2URL=http://www.diodes.com/datasheets/ds30217.pdf, DatasheetVersion="Rev. 15-2", Mounting Technology="Surface Mount", PackageDescription="2-Pin SOD-123, Body 2.7 x 1.55 mm, Pitch 3.7 mm", PackageReference=SOD-123-2, Packing="Tape and Reel", PartNumber=1N5819HW-7-F, RoHS=TRUE, Total Capacitance CT (pF)=50, VR (RMS) (V)=28
L1: library part CMP-1354-00041-1, "WE-LQS SMD Power Inductor, L=33.0 µH", Inductance="33.0 µH", Manufacturer="Wuerth Elektronik", ComponentLink1Description="Manufacturer URL", ComponentLink1URL=http://www.we-online.com, ComponentLink2Description=Datasheet, ComponentLink2URL=http://katalog.we-online.de/pbs/datasheet/74404054330.pdf, PackageReference="WE-LQS 5040", PartNumber=74404054330
P2 P3: library part "Header 15X2", "Header, 15-Pin, Dual row", Current Rating=-, Insulation Color=Black, Manufacturer="Samtec Inc.", Material Flammability Rating="UL94 V-0", Operating Temperature="-55°C ~ 125°C", Supplier Part Number 1=SAM1052-15-ND, Applications=-, Category="Connectors, Interconnects", ComponentLink1Description=http://suddendocs.samtec.com/prints/tsw-xxx-xx-xxx-x-xx-xxx-mkt.pdf, ComponentLink1URL=http://suddendocs.samtec.com/prints/tsw-xxx-xx-xxx-x-xx-xxx-mkt.pdf, Connector Type=Header, Contact Finish - Mating=Gold, Contact Finish - Post=Gold, Contact Finish Thickness - Mating="10.0µin (0.25µm)", Contact Finish Thickness - Post="3.00µin (0.076µm)", Contact Length - Mating="0.320\" (8.13mm)", Contact Length - Post="0.110\" (2.79mm)", Contact Material="Phosphor Bronze", Contact Shape=Square, Contact Type="Male Pin", Fastening Type=Push-Pull, Features=-, Ingress Protection=-, Insulation Height="0.100\" (2.54mm)", Insulation Material="Polybutylene Terephthalate (PBT)", Manufacturer Part Number=TSW-115-14-G-D, Mated Stacking Heights=-, Mounting Type="Through Hole", Number of Positions=30, Number of Positions Loaded=All, Number of Rows=2, Overall Contact Length="0.530\" (13.46mm)", Packaging=Bulk, Part Status=Active, Pitch - Mating="0.100\" (2.54mm)", Pricing 1="1=3.69, 10=3.3, 100=2.7176, 500=2.1482, 1000=1.84409, 5000=1.68233, 10000=1.61763 (USD)", RoHS="RoHS Compliant", Row Spacing - Mating="0.100\" (2.54mm)", Shrouding=Unshrouded, Stock 1=0, Style="Board to Board or Cable", Supplier 1=Digi-Key, Termination=Solder, Voltage Rating=-
R1: library part CMP-1013-00215-1, "RES SMD 300K OHM 1% 1/8W 0805", Manufacturer="Vishay Dale", Manufacturer Part Number=CRCW0805300KFKEAHP, Operating Temperature="-55°C ~ 155°C", Package / Case="0805 (2012 Metric)", Power (Watts)="0.5W, 1/2W", Supplier Device Package=0805, Supplier Part Number 1=541-300KTCT-ND, Temperature Coefficient=±100ppm/°C, Tolerance=±1%, Category=Resistors, ComponentLink1Description=http://www.vishay.com/docs/20043/crcwhpe3.pdf, ComponentLink1URL=http://www.vishay.com/docs/20043/crcwhpe3.pdf, Composition="Thick Film", Failure Rate=-, Features="Automotive AEC-Q200, Pulse Withstanding", Height - Seated (Max)="0.020\" (0.50mm)", Packaging="Cut Tape (CT)", Part Status=Active, Pricing 1="1=0.28, 10=0.233, 100=0.0911, 1000=0.03812, 2500=0.03494 (USD)", RoHS="RoHS Compliant", Size / Dimension="0.079\" L x 0.049\" W (2.00mm x 1.25mm)", Stock 1=3851, Supplier 1=Digi-Key
R2: library part CMP-1013-00215-1, "RES SMD 499K OHM 0.1% 1/8W 0805", Manufacturer="Panasonic Electronic Components", Manufacturer Part Number=ERA-6AEB4993V, Operating Temperature="-55°C ~ 155°C", Package / Case="0805 (2012 Metric)", Power (Watts)="0.125W, 1/8W", Supplier Device Package=0805, Supplier Part Number 1=P499KDACT-ND, Temperature Coefficient=±25ppm/°C, Tolerance=±0.1%, Category=Resistors, ComponentLink1Description=https://industrial.panasonic.com/cdbs/www-data/pdf/RDM0000/AOA0000C307.pdf, ComponentLink1URL=https://industrial.panasonic.com/cdbs/www-data/pdf/RDM0000/AOA0000C307.pdf, Composition="Thin Film", Failure Rate=-, Features="Automotive AEC-Q200", Height - Seated (Max)="0.024\" (0.60mm)", Packaging="Cut Tape (CT)", Part Status=Active, Pricing 1="1=0.36, 10=0.302, 100=0.1182, 1000=0.04948, 2500=0.04536 (USD)", RoHS="RoHS Compliant", Size / Dimension="0.079\" L x 0.049\" W (2.00mm x 1.25mm)", Stock 1=125602, Supplier 1=Digi-Key
R3: library part CMP-1013-00215-1, "RES SMD 18.2K OHM 1% 1/8W 0805", Manufacturer="Panasonic Electronic Components", Manufacturer Part Number=ERJ-6ENF1822V, Operating Temperature="-55°C ~ 155°C", Package / Case="0805 (2012 Metric)", Power (Watts)="0.125W, 1/8W", Supplier Device Package=0805, Supplier Part Number 1=P18.2KCCT-ND, Temperature Coefficient=±100ppm/°C, Tolerance=±1%, Category=Resistors, ComponentLink1Description=https://industrial.panasonic.com/cdbs/www-data/pdf/RDA0000/AOA0000C304.pdf, ComponentLink1URL=https://industrial.panasonic.com/cdbs/www-data/pdf/RDA0000/AOA0000C304.pdf, Composition="Thick Film", Failure Rate=-, Features="Automotive AEC-Q200", Height - Seated (Max)="0.028\" (0.70mm)", Packaging="Cut Tape (CT)", Part Status=Active, Pricing 1="1=0.1, 10=0.079, 100=0.0305, 1000=0.0134, 2500=0.01157 (USD)", RoHS="RoHS Compliant", Size / Dimension="0.079\" L x 0.049\" W (2.00mm x 1.25mm)", Stock 1=116820, Supplier 1=Digi-Key
R4: library part CMP-1013-00215-1, "RES SMD 249K OHM 0.1% 1/8W 0805", Manufacturer="Panasonic Electronic Components", Manufacturer Part Number=ERA-6AEB2493V, Operating Temperature="-55°C ~ 155°C", Package / Case="0805 (2012 Metric)", Power (Watts)="0.125W, 1/8W", Supplier Device Package=0805, Supplier Part Number 1=P249KDACT-ND, Temperature Coefficient=±25ppm/°C, Tolerance=±0.1%, Category=Resistors, ComponentLink1Description=https://industrial.panasonic.com/cdbs/www-data/pdf/RDM0000/AOA0000C307.pdf, ComponentLink1URL=https://industrial.panasonic.com/cdbs/www-data/pdf/RDM0000/AOA0000C307.pdf, Composition="Thin Film", Failure Rate=-, Features="Automotive AEC-Q200", Height - Seated (Max)="0.024\" (0.60mm)", Packaging="Cut Tape (CT)", Part Status=Active, Pricing 1="1=0.36, 10=0.302, 100=0.1182, 1000=0.04948, 2500=0.04536 (USD)", RoHS="RoHS Compliant", Size / Dimension="0.079\" L x 0.049\" W (2.00mm x 1.25mm)", Stock 1=18568, Supplier 1=Digi-Key
R5: library part CMP-1013-00215-1, "RES SMD 33K OHM 1% 1/2W 0805", Manufacturer="Vishay Dale", Manufacturer Part Number=CRCW080533K0FKEAHP, Operating Temperature="-55°C ~ 155°C", Package / Case="0805 (2012 Metric)", Power (Watts)="0.5W, 1/2W", Supplier Device Package=0805, Supplier Part Number 1=541-33.0KTCT-ND, Temperature Coefficient=±100ppm/°C, Tolerance=±1%, Category=Resistors, ComponentLink1Description=http://www.vishay.com/docs/20043/crcwhpe3.pdf, ComponentLink1URL=http://www.vishay.com/docs/20043/crcwhpe3.pdf, Composition="Thick Film", Failure Rate=-, Features="Automotive AEC-Q200, Pulse Withstanding", Height - Seated (Max)="0.020\" (0.50mm)", Packaging="Cut Tape (CT)", Part Status=Active, Pricing 1="1=0.28, 10=0.233, 100=0.0911, 1000=0.03812, 2500=0.03494 (USD)", RoHS="RoHS Compliant", Size / Dimension="0.079\" L x 0.049\" W (2.00mm x 1.25mm)", Stock 1=2026, Supplier 1=Digi-Key
R6 R9: library part CMP-1013-00215-1
R7 R8 R10 R11: library part CMP-1011-00463-1
R12: library part CMP-1013-00215-1, "RES SMD 43.2K OHM 1% 1/8W 0805", Manufacturer="Vishay Dale", Manufacturer Part Number=CRCW080543K2FKEA, Operating Temperature="-55°C ~ 155°C", Package / Case="0805 (2012 Metric)", Power (Watts)="0.125W, 1/8W", Supplier Device Package=0805, Supplier Part Number 1=541-43.2KCCT-ND, Temperature Coefficient=±100ppm/°C, Tolerance=±1%, Category=Resistors, ComponentLink1Description=http://www.vishay.com/docs/20035/dcrcwe3.pdf, ComponentLink1URL=http://www.vishay.com/docs/20035/dcrcwe3.pdf, Composition="Thick Film", Failure Rate=-, Features="Automotive AEC-Q200", Height - Seated (Max)="0.020\" (0.50mm)", Packaging="Cut Tape (CT)", Part Status=Active, Pricing 1="1=0.1, 10=0.055, 100=0.0223, 1000=0.01003, 2500=0.0087 (USD)", RoHS="RoHS Compliant", Size / Dimension="0.079\" L x 0.049\" W (2.00mm x 1.25mm)", Stock 1=68577, Supplier 1=Digi-Key
R13 R15 R17 R19 R21 R24 R27: library part CMP-1013-00215-1, "RES SMD 0 OHM JUMPER 1/8W 0805", Manufacturer="Panasonic Electronic Components", Manufacturer Part Number=ERJ-6GEY0R00V, Operating Temperature="-55°C ~ 155°C", Package / Case="0805 (2012 Metric)", Power (Watts)="0.125W, 1/8W", Supplier Device Package=0805, Supplier Part Number 1=P0.0ACT-ND, Temperature Coefficient=-, Tolerance=Jumper, Category=Resistors, ComponentLink1Description=http://industrial.panasonic.com/www-cgi/jvcr13pz.cgi?E+PZ+3+AOA0001+ERJ6GEY0R00V+7+WW, ComponentLink1URL=http://industrial.panasonic.com/www-cgi/jvcr13pz.cgi?E+PZ+3+AOA0001+ERJ6GEY0R00V+7+WW, Composition="Thick Film", Failure Rate=-, Features="Automotive AEC-Q200", Height - Seated (Max)="0.028\" (0.70mm)", Packaging="Cut Tape (CT)", Part Status=Active, Pricing 1="1=0.1, 10=0.074, 25=0.0532, 50=0.0406, 100=0.03, 250=0.02288, 500=0.0183, 1000=0.01347 (USD)", RoHS="RoHS Compliant", Size / Dimension="0.079\" L x 0.049\" W (2.00mm x 1.25mm)", Stock 1=3414819, Supplier 1=Digi-Key
R14 R25: library part CMP-1013-00215-1, "RES SMD 4.02K OHM 1% 1/8W 0805", Manufacturer="Vishay Dale", Manufacturer Part Number=CRCW08054K02FKEAHP, Operating Temperature="-55°C ~ 155°C", Package / Case="0805 (2012 Metric)", Power (Watts)="0.5W, 1/2W", Supplier Device Package=0805, Supplier Part Number 1=541-4.02KTCT-ND, Temperature Coefficient=±100ppm/°C, Tolerance=±1%, Category=Resistors, ComponentLink1Description=http://www.vishay.com/docs/20043/crcwhpe3.pdf, ComponentLink1URL=http://www.vishay.com/docs/20043/crcwhpe3.pdf, Composition="Thick Film", Failure Rate=-, Features="Automotive AEC-Q200, Pulse Withstanding", Height - Seated (Max)="0.020\" (0.50mm)", Packaging="Cut Tape (CT)", Part Status=Active, Pricing 1="1=0.28, 10=0.233, 100=0.0911, 1000=0.03812, 2500=0.03494 (USD)", RoHS="RoHS Compliant", Size / Dimension="0.079\" L x 0.049\" W (2.00mm x 1.25mm)", Stock 1=2935, Supplier 1=Digi-Key
R18 R23: library part CMP-1011-00463-1, "7.5K"
R20: library part Trimmer, "TRIMMER 5K OHM 0.25W PC PIN", Manufacturer="Vishay Foil Resistors (Division of Vishay Precision Group)", Manufacturer Part Number=Y00535K00000J0L, Power (Watts)="0.25W, 1/4W", Resistance (Ohms)=5k, Resistive Material="Metal Foil", Supplier Part Number 1=804-1020-ND, Temperature Coefficient=±10ppm/°C, Tolerance=±5%, Adjustment Type="Side Adjustment", Category="Potentiometers, Variable Resistors", ComponentLink1Description=http://www.vishaypg.com/docs/63053/1240.pdf, ComponentLink1URL=http://www.vishaypg.com/docs/63053/1240.pdf, Mounting Type="Through Hole", Number of Turns=21, Packaging=Bulk, Part Status=Active, Pricing 1="1=34.42, 10=32.265, 25=26.5292, 50=22.944, 100=22.227, 250=20.793, 500=19.2156 (USD)", RoHS="RoHS Compliant", Size / Dimension="Rectangular - 0.250\" x 0.175\" Face x 0.250\" L (6.35mm x 4.45mm x 6.35mm)", Stock 1=679, Supplier 1=Digi-Key, Termination Style="PC Pins"
R22 R28: library part CMP-1013-00215-1, "RES SMD 1M OHM 1% 1/8W 0805", Manufacturer="Vishay Dale", Manufacturer Part Number=RCV08051M00FKEA, Operating Temperature="-55°C ~ 155°C", Package / Case="0805 (2012 Metric)", Power (Watts)="0.125W, 1/8W", Supplier Device Package=0805, Supplier Part Number 1=BC2810CT-ND, Temperature Coefficient=±100ppm/°C, Tolerance=±1%, Category=Resistors, ComponentLink1Description=http://www.vishay.com/docs/20054/rcve3.pdf, ComponentLink1URL=http://www.vishay.com/docs/20054/rcve3.pdf, Composition="Thick Film", Failure Rate=-, Features="High Voltage", Height - Seated (Max)="0.020\" (0.50mm)", Packaging="Cut Tape (CT)", Part Status=Active, Pricing 1="1=0.31, 10=0.266, 100=0.1041, 1000=0.04356, 2500=0.03993 (USD)", RoHS="RoHS Compliant", Size / Dimension="0.079\" L x 0.049\" W (2.00mm x 1.25mm)", Stock 1=15942, Supplier 1=Digi-Key
R29 R32: library part CMP-1013-00215-1, "RES SMD 100K OHM 1% 1/8W 0805", Manufacturer="Vishay Dale", Manufacturer Part Number=RCA0805100KFKEA, Operating Temperature="-55°C ~ 155°C", Package / Case="0805 (2012 Metric)", Power (Watts)="0.125W, 1/8W", Supplier Device Package=0805, Supplier Part Number 1=541-2230-1-ND, Temperature Coefficient=±100ppm/°C, Tolerance=±1%, Category=Resistors, ComponentLink1Description=http://www.vishay.com/docs/20037/rcae3.pdf, ComponentLink1URL=http://www.vishay.com/docs/20037/rcae3.pdf, Composition="Thick Film", Failure Rate=-, Features="Anti-Sulfur, Automotive AEC-Q200", Height - Seated (Max)="0.020\" (0.50mm)", Packaging="Cut Tape (CT)", Part Status=Active, Pricing 1="1=0.1, 10=0.079, 100=0.0303, 1000=0.01331, 2500=0.0115 (USD)", RoHS="RoHS Compliant", Size / Dimension="0.079\" L x 0.049\" W (2.01mm x 1.25mm)", Stock 1=18704, Supplier 1=Digi-Key
R30 R33 R34 R35: library part CMP-1013-00215-1, "RES SMD 10K OHM 1% 1/8W 0805", Manufacturer="Vishay Dale", Manufacturer Part Number=CRCW080510K0FKEA, Operating Temperature="-55°C ~ 155°C", Package / Case="0805 (2012 Metric)", Power (Watts)="0.125W, 1/8W", Supplier Device Package=0805, Supplier Part Number 1=541-10.0KCCT-ND, Temperature Coefficient=±100ppm/°C, Tolerance=±1%, Category=Resistors, ComponentLink1Description=http://www.vishay.com/docs/20035/dcrcwe3.pdf, ComponentLink1URL=http://www.vishay.com/docs/20035/dcrcwe3.pdf, Composition="Thick Film", Failure Rate=-, Features="Automotive AEC-Q200", Height - Seated (Max)="0.020\" (0.50mm)", Packaging="Cut Tape (CT)", Part Status=Active, Pricing 1="1=0.1, 10=0.055, 100=0.0223, 1000=0.01003, 2500=0.0087 (USD)", RoHS="RoHS Compliant", Size / Dimension="0.079\" L x 0.049\" W (2.00mm x 1.25mm)", Stock 1=1104982, Supplier 1=Digi-Key
R31: library part CMP-1013-00215-1, "RES SMD 100 OHM 1% 1/8W 0805"
TP1 TP2 TP4 TP5 TP6 TP7 TP8 TP9 TP10 TP11 TP12: library part CMP-1672-00009-1, "Test Point, Orange, 1-Pin THD, RoHS", Forward Current="3 A", Forward Voltage="1.08 V", Max Operating Temperature="150 degC", Max Surge Current="80 A", Min Operating Temperature="-65 degC", Package Quantity=500, Peak Reverse Current="600 uA", ComponentLink1Description="Manufacturer URL", ComponentLink1URL=http://www.keyelco.com/, ComponentLink2Description=Datasheet, ComponentLink2URL=http://keyelco.com/userAssets/file/M65p56.pdf, DatasheetVersion=Jun-15, Diameter="5.3 mm", Height="0.25 inch", Length="9.5 mm", Mount="Through Hole", PackageDescription="1-Pin Through Hole Device, Dia 2.54 mm", PackageReference=5003, Packaging=Bulk, Pins=2, Radiation Hardening=No, REACH SVHC="No SVHC", RoHSCompliant=true, Weight="0.01 lb", Width="0.25 inch"
TP13: library part CMP-0484-00002-2, "Test Point, Surface Mount, Circular, Pad Diameter 1 mm", Manufacturer="No Vendor", PartNumber=TP-SM-C-100
U1: library part CMP-0055-00867-3, "Low Power CMOS Dual Operational Amplifier, 8-pin Narrow SOIC", Base Part Number=LPC662, Current - Supply=86µA, Manufacturer="Texas Instruments", Manufacturer Part Number=LPC662AIM/NOPB, Operating Temperature="-40°C ~ 85°C", Package / Case="8-SOIC (0.154\", 3.90mm Width)", Supplier Device Package=8-SOIC, Supplier Part Number 1=LPC662AIM/NOPB-ND, Voltage - Supply, Single/Dual (±)="4.75 V ~ 15.5 V, ±2.38 V ~ 7.75 V", Amplifier Type="General Purpose", Category="Integrated Circuits (ICs)", ComponentLink1Description=http://www.ti.com/lit/ds/symlink/lpc662.pdf, ComponentLink1URL=http://www.ti.com/lit/ds/symlink/lpc662.pdf, Mounting Type="Surface Mount", Output Type=Rail-to-Rail, Packaging=Tube, Part Status=Active, Pricing 1="1=3.4, 95=2.88905, 190=2.50379, 570=2.13144, 1045=1.7976 (USD)", RoHS="RoHS Compliant", Slew Rate="0.11 V/µs", Stock 1=319, Supplier 1=Digi-Key
U2: library part CMP-0394-01371-1, "Single Output High PSRR LDO, 200 mA, Adjustable 1.2 to 6.5 V Output, 2.7 to 6.5 V Input, with Low IQ, 6-pin SON (DRV), -40 to 85 degC, Green (RoHS & no Sb/Br)", Manufacturer="Texas Instruments", Rating=Catalog, Accuracy(%)=2, ComponentLink1Description="Manufacturer URL", ComponentLink1URL=http://www.ti.com/, ComponentLink2Description=Datasheet, ComponentLink2URL=http://www.ti.com/general/docs/lit/getliterature.tsp?genericPartNumber=TPS79901&fileType=pdf, ComponentLink3Description="Package Specification", ComponentLink3URL=http://www.ti.com/litv/pdf/mpds216d, ComponentLink4Description="URL Link1", ComponentLink4URL="Samples URL:http://www.ti.com/product/tps79901#samples", DatasheetVersion=SBVS056J, Eco-Plan="Green (RoHS & no Sb/Br)", Iout(Max)(A)=0.2, Iq(Typ)(mA)=0.04, Mounting Technology="Surface Mount", PackageDescription="6-Pin Plastic Small Outline No-Lead, Body 2 x 2 mm, Pitch 0.65 mm", PackageReference=DRV6-1600X1000TP, PackageVersion=4206925/E, PartNumber=TPS79901DRVRG4, SubFamily="Single Channel LDO", Vdo(Typ)(mV)=90, Vin(Max)(V)=6.5, Vin(Min)(V)=2.7, Vout Adj(Max)(V)=6.5, Vout Adj(Min)(V)=1.2
U3: "IC REG MULT CONFIG INV ADJ 8MSOP", Supplier Part Number 1=584-LT8570EMS8ETRPBF, Supplier 1=Mouser
U5 U9 U11: library part CMP-0809-00005-2, "Precision, Low Noise, Rail-to-Rail Output, Zero-Drift Operational Amplifier, 4 to 36 V, -40 to 125 degC, 5-pin SOT23 (DBV5), Green (RoHS & no Sb/Br)", Manufacturer="Texas Instruments", Rating=Catalog, Total Supply Voltage(Max)(+5V is 5, +/-5V is 10)=36, Total Supply Voltage(Min)(+5V is 5, +/-5V is 10)=4, CMRR(Min)(dB)=120, Code_JEDEC=MO-178, ComponentLink1Description="Manufacturer URL", ComponentLink1URL=http://www.ti.com/, ComponentLink2Description=Datasheet, ComponentLink2URL=http://www.ti.com/lit/ds/symlink/opa188.pdf, ComponentLink3Description="Package Specification", ComponentLink3URL=http://www.ti.com/litv/pdf/mpds018i, DatasheetVersion=SBOS642A, Eco-Plan="Green (RoHS & no Sb/Br)", GBW(Typ)(MHz)=2, Iq per channel(Max)(mA)=0.51, Mounting Technology="Surface Mount", Number of Channels=1, Offset Drift(Typ)(uV/C)=0.03, PackageDescription="5-Pin Plastic Small Outline, Body 1.6 x 2.9 mm, Pitch 0.95 mm", PackageReference=DBV0005A, PackageVersion="4073253-4/K, 03/2006", PartNumber=OPA188AIDBVR, Slew Rate(Typ)(V/us)=0.8, SubFamily="Zero Drift Precision Amplifier"
U6: library part CMP-0784-00191-1, "Ultralow Noise, High Accuracy Voltage Reference, 5 V Output, 3 to 15 V Supply, Industrial, 8-pin SOIC (R-8), Reel", Manufacturer="Analog Devices", Operating Temp Range="-40 to 125 degC", Code_JEDEC=MS-012-AA, ComponentLink1Description="Manufacturer URL", ComponentLink1URL=http://www.analog.com/en/index.html, ComponentLink2Description=Datasheet, ComponentLink2URL=http://www.analog.com/static/imported-files/data_sheets/ADR4520_4525_4530_4533_4540_4550.pdf, ComponentLink3Description="Package Specification", ComponentLink3URL=http://www.analog.com/static/imported-files/packages/PKG_PDF/SOIC_Narrow%20(R)/R_8.pdf, ComponentLink4Description="URL Link1", ComponentLink4URL="Product URL:http://www.analog.com/en/special-linear-functions/voltage-references/adr4550/products/product.html", DatasheetVersion="Rev. 0", Max V Supply (V)=15, Min V Supply (V)=3, Mounting Technology="Surface Mount", PackageDescription="8-Pin Standard Small Outline Package, Body 4.9 x 3.9 mm, Pitch 1.27 mm", PackageReference=R-8, PackageVersion="060506-A, 06/2006", Packing=Reel, PartId=1, PartNumber=ADR4550BRZ-R7, Ref Out TC (ppm/C)=2, Vout=5V
U7: "IC DELAY BLOCK 8TAP PROG TSOT23", Base Part Number=LTC6994, Manufacturer="Linear Technology/Analog Devices", Manufacturer Part Number=LTC6994CS6-2#TRMPBF, Operating Temperature="0°C ~ 70°C", Package / Case="SOT-23-6 Thin, TSOT-23-6", Supplier Device Package=TSOT-23-6, Supplier Part Number 1=LTC6994CS6-2#TRMPBFCT-ND, Voltage - Supply="2.25 V ~ 5.5 V", Available Total Delays="1µs ~ 33.6s", Category="Integrated Circuits (ICs)", ComponentLink1Description=http://www.linear.com/docs/29725, ComponentLink1URL=http://www.linear.com/docs/29725, Delay to 1st Tap=-, Function=Programmable, Mounting Type="Surface Mount", Packaging="Cut Tape (CT)", Part Status=Active, Pricing 1="1=3.42, 25=3.0496, 100=1.9217, 250=1.76156 (USD)", RoHS="RoHS Compliant", Stock 1=1401, Supplier 1=Digi-Key
U8: library part MAX333CWP+, "IC SWITCH QUAD SPDT 20TSSOP", Base Part Number=MAX333, Channel Capacitance (CS(off), CD(off))=5pF, Current - Leakage (IS(off)) (Max)=250pA, Manufacturer="Maxim Integrated", On-State Resistance (Max)="45 Ohm", Operating Temperature="-40°C ~ 85°C (TA)", Package / Case="20-TSSOP (0.173\", 4.40mm Width)", Supplier Device Package=20-TSSOP, Supplier Part Number 1=MAX333AEUP+-ND, Voltage - Supply, Dual (V±)="±4.5 V ~ 20 V", Voltage - Supply, Single (V+)="10 V ~ 30 V", -3db Bandwidth=-, Category="Integrated Circuits (ICs)", Channel-to-Channel Matching (&Delta;Ron)="2 Ohm (Max)", Charge Injection=2pC, ComponentLink1Description=https://pdfserv.maximintegrated.com/en/ds/MAX333A.pdf, ComponentLink1URL=https://pdfserv.maximintegrated.com/en/ds/MAX333A.pdf, Crosstalk="-78dB @ 1MHz", Manufacturer Part Number=MAX333AEUP+, Multiplexer/Demultiplexer Circuit=2:1, Packaging=Tube, Part Status=Active, Pricing 1="1=6.77, 10=6.432, 25=6, 50=5.8942 (USD)", RoHS="RoHS Compliant", Stock 1=1328, Supplier 1=Digi-Key, Switch Circuit=SPDT, Switch Time (Ton, Toff) (Max)="175ns, 145ns"
U10: library part CMP-0023-00489-1, "10k Digital Potentiometer (Voltage Divider) with 3-Wire Serial SPI Control Interface, Non-Volatile, Linear Taper, 1024 Steps, -40 to 85 degC, 14-pin TSSOP (U14-1), Tape and Reel", Applications="Fiber Communications, Power Supply Cal.", Code_JEDEC=MO-153, ComponentLink1Description="Manufacturer URL", ComponentLink1URL=http://www.maximintegrated.com/, ComponentLink2Description=Datasheet, ComponentLink2URL=http://datasheets.maximintegrated.com/en/ds/MAX5481-MAX5484.pdf, ComponentLink3Description="Package Specification", ComponentLink3URL=http://pdfserv.maximintegrated.com/package_dwgs/21-0066.PDF, Control Interface="3-Wire Serial SPI", DatasheetVersion="Rev. 5", Features="EEPROM Wiper Memory", Mounting Technology="Surface Mount", PackageDescription="14-Pin Thin Shrink Small-Outline Package (U14-1), Body 5 x 4.4 mm, Pitch 0.65 mm", PackageReference=U14-1, PackageVersion="Rev. L, 07/2010", PartId=1, PartNumber=MAX5481EUD-T
U13: library part CMP-0809-00005-2, "Precision, Low Noise, Rail-to-Rail Output, Zero-Drift Operational Amplifier, 4 to 36 V, -40 to 125 degC, 5-pin SOT23 (DBV5), Green (RoHS & no Sb/Br)", Case/Package=SOT-23-5, Input Bias Current=160pA, Input Offset Voltage (Vos)=6uV, Input Voltage Noise Density="8.8nV/sqrt Hz", Manufacturer="Texas Instruments", Max Dual Supply Voltage=18V, Max Operating Temperature=125°C, Max Supply Voltage=36V, Min Dual Supply Voltage=2V, Min Operating Temperature=-40°C, Min Supply Voltage=4V, Nominal Supply Current=510uA, Operating Supply Current=450uA, Output Current per Channel=18mA, Package Quantity=3000, Power Supply Rejection Ratio (PSRR)=142dB, Voltage Gain=136dB, Common Mode Rejection Ratio=120dB, ComponentLink1Description=https://datasheet.ciiva.com/24017/opa188-372986-24017253.pdf, ComponentLink1URL=https://datasheet.ciiva.com/24017/opa188-372986-24017253.pdf, ComponentLink2Description=https://datasheet.ciiva.com/18622/opa188-18622375.pdf, ComponentLink2URL=https://datasheet.ciiva.com/18622/opa188-18622375.pdf, Contact Plating=Nickel,Gold, Gain Bandwidth Product=2MHz, Lead Free="Lead Free", Manufacturer Part Number=OPA188AIDBVR, Nominal Gain Bandwidth Product=2MHz, Number of Channels=1, Number of Circuits=1, Number of Elements=1, Number of Pins=5, Packaging="Tape and Reel", Pricing 1="1=2.1871, 10=1.943, 25=1.9086, 100=1.5565, 250=1.5371, 500=1.3168, 1000=1.2243 (USD)", Slew Rate=0.8V/µs, Stock 1=95, Supplier 1=Arrow, Supplier Part Number 1=OPA188AIDBVR, Unity Gain Bandwidth Product=2MHz